# Altium PCB digital.PcbDoc (part 3 of 3)
Units mm, origin at the board's own origin, x right, y up, seen from the top; angles counter-clockwise.
Board outline 25.2 x 25.2 mm, 4 copper layers (Top Layer, Inner Layer 1, Inner Layer 2, Bottom Layer), stack 1.51 mm thick; 75 components, 68 nets, 309 pads, 118 vias.
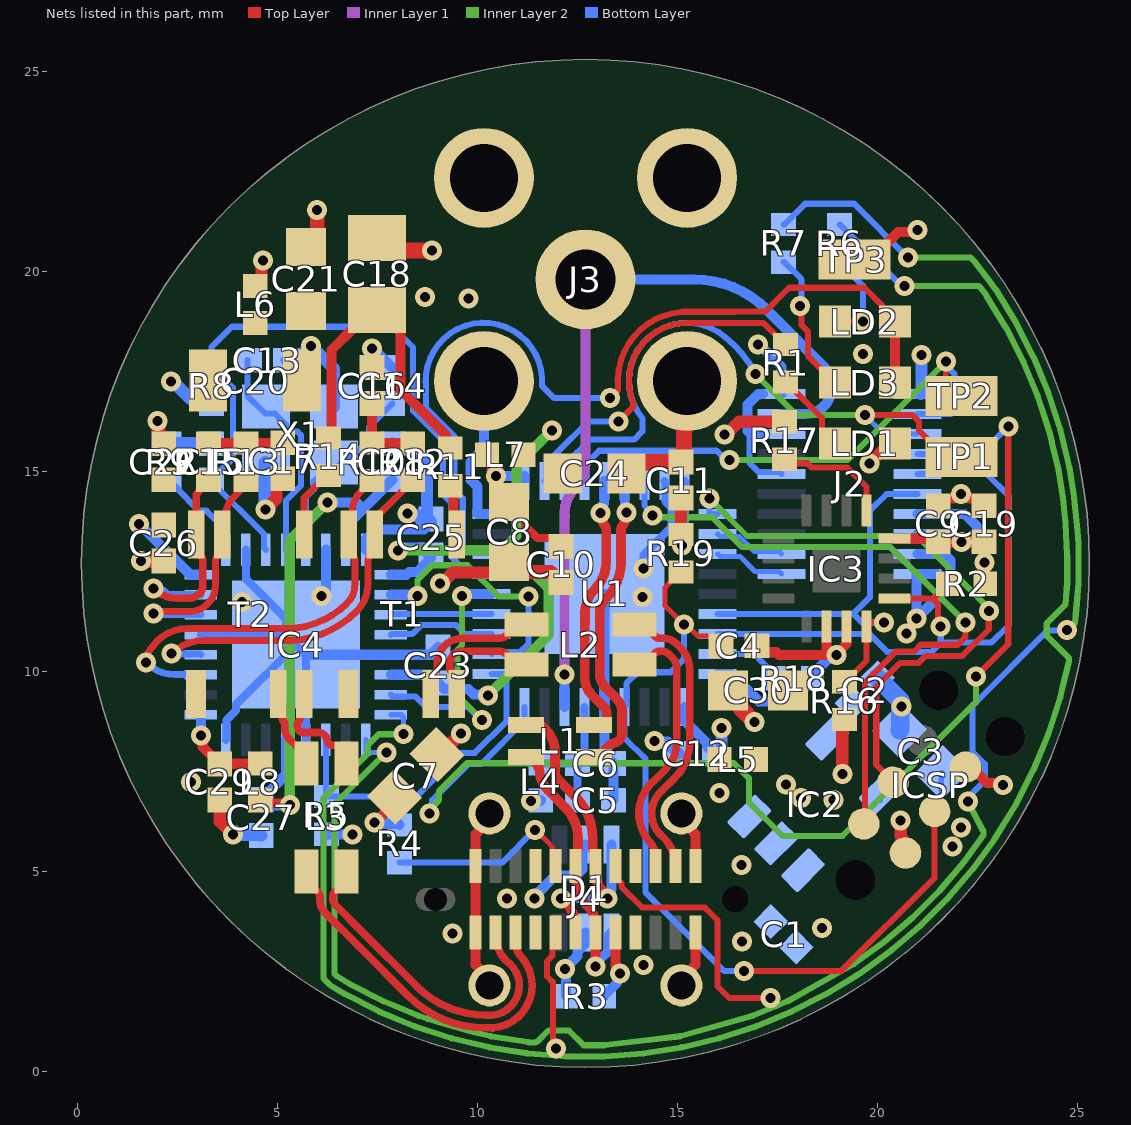
[diagram p4: the nets of this part, all layers, seen from the top]

## Via types
v1: diameter 0.5, hole 0.25, Top Layer to Bottom Layer, tented both sides, 118 vias

## Nets (pads, with @x,y where several pads share a name; then routed paths per layer and width w, separated by ;. In a path a pad name is that pad's centre, name@x,y a point inside that pad or via, vN(x,y) a via of type N, cw(c..) or ccw(c..) an arc to the next point about the centre after c; other vN are vias at no path point) (continued)
ETH_LED0: IC4.1 J4.B8 R7.1 | length 54.4
  Top Layer w0.152: J4.B8@13.45,5.13 13.45,4.855 13.597,4.708 13.597,4.621 14.119,4.098 15.684,4.098 16.002,3.78 16.002,2.134 16.299,1.836 v1(17.323,1.836)
  Inner Layer 2 w0.152: v1(7.722,7.976) 6.426,6.68 6.426,2.441 6.484,2.383 6.81,2.183 7.654,1.754 8.528,1.391 8.754,1.318 8.977,1.245 ; 8.978,1.245 ccw(c9.024,1.39) 8.982,1.244 9.886,0.989 ccw(c9.927,1.136) 9.89,0.988 10.343,0.879 ccw(c10.378,1.027) 10.354,0.877 11.278,0.731 11.396,0.721 ccw(c11.408,0.873) 11.516,0.765 11.774,1.024 12.287,1.024 12.655,0.656 13.167,0.656 ccw(c13.167,0.808) 13.185,0.657 14.279,0.786 ; 14.279,0.786 14.958,0.867 15.05,0.878 ccw(c15.022,1.027) 15.057,0.879 ccw(c15.022,1.027) 15.064,0.881 16.86,1.388 ccw(c16.818,1.534) 16.862,1.388 16.865,1.389 ccw(c16.821,1.535) 16.879,1.394 17.447,1.63 17.5,1.652 ; v1(17.323,1.836) 17.5,1.659 17.5,1.652 ; 19.401,2.681 cw(c19.313,2.805) 19.387,2.672 17.756,1.758 cw(c17.682,1.892) 17.741,1.751 17.5,1.652 ; 19.402,2.681 20.162,3.234 20.882,3.849 21.551,4.518 22.166,5.238 22.654,5.91 22.654,5.997 22.637,6.03 v1(22.262,6.746) ; v1(20.763,20.345) 22.328,20.345 22.417,20.256 22.801,19.763 22.955,19.552 23.419,18.795 23.461,18.726 23.9,17.863 24.269,16.974 24.271,16.969 24.459,16.39 24.57,16.048 24.638,15.766 cw(c24.367,15.699) 24.638,15.764 24.795,15.111 cw(c24.523,15.046) 24.799,15.088 24.912,14.374 cw(c24.637,14.329) 24.915,14.355 24.997,13.525 24.997,13.523 25.024,13.184 25.024,12.222 25.024,12.216 24.971,11.546 24.942,11.213 24.905,11.176 24.901,11.172 24.897,11.168 v1(24.737,11.032)
  Bottom Layer w0.127: IC4.1@7.211,8.293 7.211,8.032 7.267,7.976 v1(7.722,7.976)
  Bottom Layer w0.152: R7.1@17.653,21.171 17.673,21.171 18.194,21.692 19.417,21.692 v1(20.763,20.345) ; v1(22.262,6.746) 22.262,6.84 22.685,7.263 22.685,7.682 22.377,7.99 22.377,9.144 24.259,11.025 24.731,11.025 v1(24.737,11.032)
ETH_LED1: IC4.32 J4.A8 R6.1 | length 49.6
  Top Layer w0.152: J4.A8@11.95,3.47 11.876,3.396 11.876,3.033 11.875,3.032 11.875,2.89 11.739,2.753 11.739,2.378 11.887,2.229 11.887,0.834 11.895,0.825 11.895,0.637 v1(11.962,0.57)
  Inner Layer 1 w0.152: v1@11.962,0.503 v1(11.962,0.57)
  Inner Layer 2 w0.152: v1(8.153,8.433) 8.149,8.429 7.534,8.429 7.268,8.163 7.268,7.953 6.147,6.832 6.147,2.325 6.309,2.162 6.674,1.939 7.537,1.5 8.424,1.132 ccw(c8.483,1.272) 8.434,1.128 8.436,1.127 ; 8.437,1.127 8.441,1.126 9.352,0.83 10.28,0.607 ccw(c10.378,1.027) 10.309,0.601 11.235,0.455 ccw(c11.301,0.881) 11.265,0.451 v1@11.948,0.397 ; v1(11.962,0.57) 11.962,0.411 v1@11.948,0.397 ; 16.96,1.126 16.048,0.83 15.106,0.604 14.301,0.476 14.155,0.453 14.15,0.452 13.184,0.376 12.216,0.376 v1@11.948,0.397 ; 16.961,1.126 ccw(c16.872,1.391) 16.978,1.133 17.858,1.497 17.863,1.5 18.721,1.937 19.468,2.394 19.543,2.44 ; 19.544,2.44 ccw(c19.397,2.678) 19.561,2.451 20.328,3.009 ccw(c20.162,3.234) 20.343,3.021 20.674,3.304 21.064,3.636 ccw(c20.882,3.849) 21.079,3.651 21.757,4.328 22.386,5.065 22.934,5.819 23.463,6.679 23.9,7.537 24.271,8.431 24.568,9.347 24.57,9.352 24.629,9.596 24.788,10.259 24.788,10.34 24.743,10.385 24.232,10.897 24.232,11.201 24.701,11.67 24.744,12.227 24.744,12.899 ccw(c24.592,12.899) 24.744,12.907 24.699,13.701 ccw(c24.546,13.692) 24.698,13.707 24.637,14.329 24.523,15.046 24.366,15.701 24.359,15.733 24.301,15.972 24.199,16.286 24.009,16.872 24.006,16.877 23.647,17.746 23.217,18.59 23.206,18.607 ; v1(20.672,19.635) 22.472,19.635 22.535,19.635 22.58,19.59 22.588,19.581 22.722,19.397 23.197,18.622
  Bottom Layer w0.127: IC4.32@7.836,8.918 8.097,8.918 8.153,8.862 v1(8.153,8.433)
  Bottom Layer w0.152: R6.1@19.05,21.171 19.07,21.171 20.606,19.635 v1(20.672,19.635)
ETH_RST: C15.2 IC4.19 R8.1 U1.15 | length 18.4
  Bottom Layer w0.152: C15.2@3.302,14.79 4.668,13.424 4.668,13.087 IC4.19@4.711,13.043 ; C15.2@3.35,14.79 3.737,15.177 3.744,15.177 3.886,15.319 3.886,17.099 3.37,17.615 R8.1@3.35,17.615 3.35,18.107 3.861,18.618 7.874,18.618 8.389,18.103 8.389,16.515 9.144,15.761 9.144,14.413 9.352,14.205 9.352,12.857 9.721,12.488 9.864,12.488 9.865,12.487 10.303,12.487 U1.15@10.352,12.438
ETH_SPI.CSN: IC4.26 U1.11 | length 6.5
  Inner Layer 2 w0.152: v1(8.5,11.891) 8.5,12.283 8.872,12.655 9.748,12.655 10.53,11.873 v1(11.277,11.873)
  Bottom Layer w0.152: U1.11@10.352,10.438 10.401,10.487 11.071,10.487 11.277,10.692 v1(11.277,11.873)
  Bottom Layer w0.254: IC4.26@7.836,11.918 8.473,11.918 v1(8.5,11.891)
ETH_SPI.INT: IC4.3 R5.1 U1.10 | length 8.2
  Bottom Layer w0.152: IC4.3@6.211,8.293 6.211,6.883 R5.1@6.223,6.871 8.471,6.871 9.563,7.963 9.937,7.963 10.728,8.754 10.728,9.692 10.726,9.694 10.726,9.889 10.677,9.938 U1.10@10.352,9.938
ETH_SPI.MISO: IC4.27 U1.13 | length 2.5
  Bottom Layer w0.152: IC4.27@7.836,11.418 7.854,11.436 8.476,11.436 8.477,11.438 U1.13@10.352,11.438
ETH_SPI.MOSI: IC4.31 U1.14 | length 6.7
  Inner Layer 2 w0.152: v1(9.617,11.891) 9.617,10.655 9.503,10.541 9.503,9.398 v1(10.112,8.789)
  Bottom Layer w0.152: IC4.31@7.836,9.418 7.88,9.375 8.445,9.375 8.705,9.115 9.761,9.115 10.087,8.789 v1(10.112,8.789)
  Bottom Layer w0.254: v1(9.617,11.891) 9.664,11.938 U1.14@10.352,11.938
ETH_SPI.SCLK: IC4.28 U1.12 | length 2.7
  Bottom Layer w0.152: IC4.28@7.836,10.918 7.852,10.934 8.368,10.934 8.593,11.159 9.466,11.159 9.687,10.938 U1.12@10.352,10.938
ETHJ.RX_N: J4.B10 L2.1 | length 7
  Top Layer w0.191: L2.1@13.923,10.168 ccw(c13.923,10.772) 14.35,10.345 14.36,10.355 ccw(c14.318,10.398) 14.378,10.398 14.434,10.453 cw(c14.568,10.319) 14.568,10.509 14.6,10.509 cw(c14.6,10.243) 14.788,10.431 14.867,10.353 cw(c14.579,10.065) 14.986,10.065 14.986,8.233 cw(c14.031,8.233) 14.706,7.558 14.407,7.259 cw(c14.274,7.395) 14.4,7.252 ccw(c15.1,6.45) 14.298,7.15 cw(c14.155,7.276) 14.291,7.142 14.284,7.136 14.284,7.134 ccw(c15.1,6.45) 14.291,5.758 14.293,5.756 ccw(c15.1,6.45) 14.324,5.721 cw(c14.184,5.591) 14.333,5.711 cw(c13.907,5.374) 14.436,5.495 ccw(c14.622,5.539) 14.448,5.46 14.505,5.46 14.45,5.374 J4.B10@14.45,5.13 ccw(c14.318,5.262) J4.B10@14.505,5.262
ETHJ.RX_P: J4.B11 L2.4 | length 7.4
  Top Layer w0.191: L2.4@13.923,11.168 cw(c13.923,10.564) 14.35,10.991 14.36,10.981 cw(c14.318,10.938) 14.378,10.938 14.434,10.883 ccw(c14.568,11.017) 14.568,10.827 14.665,10.827 cw(c14.665,10.401) 14.966,10.702 15.093,10.576 cw(c14.584,10.067) 15.303,10.067 15.303,8.23 cw(c14.038,8.23) 14.933,7.336 14.624,7.027 cw(c14.49,7.162) 14.615,7.018 ccw(c15.1,6.45) 14.528,6.931 ccw(c15.1,6.45) 14.631,5.868 14.654,5.846 cw(c13.938,5.13) J4.B11@14.95,5.13
ETHJ.TX_N: J4.A10 L3.1 | length 9.8
  Top Layer w0.191: L3.1@5.723,5 ccw(c6.327,5) 5.9,4.573 5.91,4.563 ccw(c5.953,4.605) 5.953,4.545 6.008,4.489 cw(c5.874,4.355) 6.064,4.355 6.064,4.264 ccw(c6.475,4.264) 6.184,3.973 7.034,3.124 7.036,3.124 8.274,1.886 ccw(c10.196,3.808) 10.196,1.09 ccw(c10.3,2.152) 11.225,2.685 ccw(c10.3,2.152) 11.107,2.851 cw(c11.485,3.229) 10.95,3.229 J4.A10@10.95,3.47 J4.A10@10.95,3.14
ETHJ.TX_P: J4.A11 L3.4 | length 8.7
  Top Layer w0.191: L3.4@6.723,5 cw(c6.119,5) 6.546,4.573 6.536,4.563 cw(c6.493,4.605) 6.493,4.545 6.437,4.489 ccw(c6.572,4.355) 6.382,4.355 6.382,4.329 ccw(c6.634,4.329) 6.455,4.151 7.096,3.511 7.098,3.511 8.482,2.127 ccw(c10.22,3.864) 10.22,1.407 ; 10.221,1.407 ccw(c10.3,2.15) 10.362,1.405 10.373,1.406 cw(c10.391,1.217) 10.382,1.407 ; 10.382,1.407 ccw(c10.3,2.15) 10.719,2.769 cw(c11.368,3.418) 10.45,3.418 J4.A11@10.45,3.47 cw(c10.318,3.338) J4.A11@10.505,3.338
ETHP_RX_N: IC4.12 R12.2 T1.2 | length 9.4
  Top Layer w0.175: v1(2.355,10.443) cw(c3.146,9.652) 3.146,10.771 5.111,10.771 ccw(c5.119,10.946) 5.114,10.771 ccw(c5.208,13.272) 6.978,11.502 ccw(c6.282,12.199) 7.267,12.199 7.267,12.75 cw(c7.542,12.75) 7.347,12.944 ccw(c7.153,13.139) 7.428,13.139 T1.2@7.428,13.42 7.545,13.537 7.545,13.932 7.865,14.252 8.159,14.547 cw(c8.333,14.52) 8.164,14.567 cw(c8.21,14.547) 8.174,14.582 8.348,14.756 cw(c8.382,14.722) R12.2@8.382,14.77
  Bottom Layer w0.175: v1(2.355,10.443) 2.367,10.431 3.073,10.431 IC4.12@3.086,10.418
ETHP_RX_P: IC4.11 R10.2 T1.1 | length 10.7
  Top Layer w0.175: v1@1.778,10.375 cw(c1.565,10.375) v1(1.716,10.225) cw(c2.292,10.225) 1.877,10.625 cw(c2.752,10) 2.752,11.075 5.224,11.075 ccw(c5.223,13.218) 6.74,11.703 ccw(c6.254,12.187) 6.939,12.187 6.939,12.75 ccw(c6.664,12.75) T1.1@6.859,12.944 ; T1.1@6.859,12.944 cw(c7.053,13.139) 6.778,13.139 T1.1@6.778,13.42 ccw(c6.584,13.614) 6.859,13.614 6.859,13.938 cw(c7.691,13.938) 7.102,14.526 7.332,14.756 cw(c7.366,14.722) R10.2@7.366,14.77
  Bottom Layer w0.175: v1@1.804,10.225 v1(1.716,10.225) ccw(c2.456,10.965) 2.456,9.918 IC4.11@3.086,9.918
ETHP_TX_N: IC4.15 R15.2 T2.1 | length 5.5
  Top Layer w0.191: v1@1.932,12.071 v1(1.905,12.071) ccw(c2.483,12.649) 2.483,11.832 2.791,11.832 ccw(c2.791,12.161) 3.024,11.928 cw(c3.048,11.904) 3.048,11.938 ccw(c2.84,12.146) 3.134,12.146 3.134,12.741 ccw(c2.85,12.741) 3.051,12.942 cw(c3.252,13.143) 2.968,13.143 T2.1@2.968,13.42 2.968,14.352 cw(c3.172,14.352) 3.027,14.495 3.087,14.555 cw(c3.136,14.555) 3.101,14.589 3.268,14.756 cw(c3.302,14.722) R15.2@3.302,14.77
  Bottom Layer w0.191: v1(1.905,12.071) 1.964,12.012 2.158,12.012 2.252,11.918 IC4.15@3.086,11.918
ETHP_TX_P: IC4.14 R13.2 T2.2 | length 6.1
  Top Layer w0.175: v1(1.904,11.442) 1.966,11.504 2.839,11.504 ccw(c2.839,12.046) 3.222,11.663 3.273,11.713 ccw(c2.84,12.146) 3.452,12.146 3.452,12.741 cw(c3.736,12.741) 3.535,12.942 ccw(c3.334,13.143) 3.618,13.143 T2.2@3.618,13.42 ccw(c3.405,13.633) 3.706,13.633 3.706,13.883 cw(c4.371,13.883) 3.901,14.353 4.096,14.548 cw(c4.144,14.548) 4.11,14.582 4.284,14.756 cw(c4.318,14.722) R13.2@4.318,14.77
  Bottom Layer w0.175: v1(1.904,11.442) 1.928,11.418 IC4.14@3.086,11.418
ETHT_RX_N: L2.2 T1.7 | length 3
  Top Layer w0.191: T1.7@9.478,9.44 9.478,9.717 ccw(c9.194,9.717) 9.395,9.918 cw(c9.596,10.119) 9.312,10.119 9.312,10.206 cw(c9.606,10.206) 9.398,10.414 cw(c9.628,10.184) 9.628,10.509 10.524,10.509 cw(c10.524,10.188) 10.751,10.415 cw(c10.708,10.373) 10.768,10.373 10.871,10.27 ccw(c11.118,10.518) 11.118,10.168 L2.2@11.223,10.168
ETHT_RX_P: L2.3 T1.6 | length 3.5
  Top Layer w0.191: T1.6@8.828,9.44 8.828,9.717 cw(c9.112,9.717) 8.911,9.918 ccw(c8.71,10.119) 8.994,10.119 8.994,10.208 cw(c9.602,10.208) 9.172,10.637 9.175,10.64 cw(c9.626,10.189) 9.626,10.827 10.524,10.827 ccw(c10.524,11.148) 10.751,10.921 ccw(c10.708,10.963) 10.768,10.963 10.871,11.066 cw(c11.118,10.818) 11.118,11.168 L2.3@11.223,11.168
ETHT_TX_N: L3.2 T2.6 | length 2
  Top Layer w0.191: T2.6@5.018,9.44 cw(c4.753,9.175) 5.128,9.175 5.128,8.811 ccw(c5.224,8.811) 5.156,8.743 cw(c5.088,8.675) 5.184,8.675 5.184,8.57 ccw(c5.534,8.57) 5.287,8.323 5.469,8.141 ccw(c5.5,8.172) 5.5,8.128 cw(c5.5,8.084) 5.531,8.115 5.621,8.025 cw(c5.373,7.778) 5.723,7.778 L3.2@5.723,7.7
ETHT_TX_P: L3.3 T2.7 | length 2.6
  Top Layer w0.191: T2.7@5.668,9.44 ccw(c5.933,9.175) 5.558,9.175 5.558,8.811 cw(c5.462,8.811) 5.53,8.743 ccw(c5.598,8.675) 5.502,8.675 5.502,8.636 ccw(c5.692,8.636) 5.558,8.501 ccw(c5.658,8.663) 5.657,8.472 6.023,8.472 cw(c6.023,8.25) 6.242,8.289 ccw(c6.429,8.325) 6.343,8.155 6.373,8.155 cw(c6.373,7.805) 6.621,8.052 cw(c6.373,7.805) 6.723,7.805 L3.3@6.723,7.7
GND: C1.1 C2.1 C3.1 C4.1 C5.1 C6.1 C7.1 C8.1 C9.1 C10.1 C11.1 C12.1 C13.2 C14.1 C15.1 C16.1 C17.1 C18.1 C19.1 C20.1 C21.1 C22.1 C23.1 C24.1 C25.1 C26.1 C27.1 C28.1 C29.1 C30.1 D1.2 IC2.2 IC3.10 IC3.11 IC4.4 IC4.8 IC4.13 IC4.18 IC4.22 IC4.24 IC4.29 IC4.33 ICSP.5 J2.12 J2.16 J2.19 J2.20 J3.SH1 J3.SH2 J3.SH3 J3.SH4 J4.A1 J4.A12 J4.B1 J4.B12 J4.Shell R3.1 R4.2 R9.1 R18.2 TP3.1 U1.5 U1.18 U1.26 U1.36 U1.37 X1.2 X1.4 | length 83.9
  Top Layer w0.254: C21.1@5.715,20.612 C21.1@5.994,20.891 ; v1(7.432,6.223) 7.928,6.718 C7.1@7.928,6.861 ; C18.1@7.493,20.839 C18.1@7.809,20.523 ; J4.Shell@10.3,2.15 10.3,2.316 9.95,2.666 J4.A12@9.95,3.47 J4.B1@9.95,5.13 9.95,5.934 10.3,6.284 J4.Shell@10.3,6.45 ; C24.1@13.729,14.954 C24.1@14.007,15.233 ; J4.Shell@15.1,2.15 15.1,2.316 15.45,2.666 J4.A1@15.45,3.195 ; J4.Shell@15.1,6.45 15.1,6.284 15.45,5.934 J4.B12@15.45,5.13 ; J4.A1@15.45,3.47 J4.A1@15.45,3.195 ; J4.A1@15.473,3.172 J4.A1@15.45,3.195 ; C4.1@16.985,10.643 17.15,10.478 17.472,10.478 17.536,10.414 v1@18.726,10.414 ; IC3.10@18.726,11.119 v1@18.726,10.414 ; IC3.11@19.226,11.119 19.226,10.686 18.974,10.434 v1(18.974,10.414) v1@18.726,10.414 ; TP3.1@19.431,20.295 19.831,20.295 20.521,20.984 20.959,20.984 v1(21.006,21.031) ; C9.1@21.52,14.144 21.703,14.327 21.91,14.327 21.976,14.393 22.046,14.393 v1(22.093,14.44) 22.14,14.393 22.207,14.393 22.273,14.327 22.48,14.327 C19.1@22.663,14.144 ; ICSP.5@22.204,7.607 22.349,7.607 22.746,7.21 23.092,7.21 v1(23.139,7.163)
  Top Layer w0.305: C29.1@3.556,6.789 3.556,6.248 v1(3.886,5.918) ; v1(4.699,14.046) 4.699,14.048 4.973,14.322 4.973,14.658 C17.1@5.131,14.815 ; v1(9.06,12.201) 9.112,12.201 9.382,12.471 10.529,12.471 C8.1@10.795,12.737
  Top Layer w0.356: v1(1.589,12.758) C26.1@2.159,12.758 ; v1(2.001,16.26) 2.029,16.232 2.029,15.82 C22.1@2.159,15.69 ; C21.1@5.994,20.891 v1(5.994,21.539) ; C8.1@10.795,12.737 11.046,12.487 11.828,12.487 C10.1@12.09,12.225
  Top Layer w0.406: C18.1@7.809,20.523 v1(8.865,20.523) ; C24.1@14.007,15.233 C11.1@15.088,15.233 15.164,15.309 15.164,17.184 J3.SH2@15.24,17.26 ; C30.1@16.268,9.525 16.565,9.228 16.565,9.098 v1(16.931,8.732)
  Bottom Layer w0.127: v1(2.001,16.26) v1@2.04,16.221 ; R9.1@2.04,15.937 2.266,15.71 R9.1@2.286,15.71 ; C15.1@3.33,15.71 C15.1@3.35,15.69
  Bottom Layer w0.152: 16.801,15.959 16.801,15.221 17.037,14.985 17.555,14.985 J2.12@17.604,14.936
  Bottom Layer w0.203: IC4.13@3.086,10.918 IC4.33@5.211,10.918 ; IC4.8@3.711,8.293 3.729,8.311 3.729,8.788 3.963,9.021 3.963,9.17 IC4.33@5.461,10.668 ; IC4.18@4.211,13.043 4.211,12.315 5.211,11.315 IC4.33@5.211,10.918 ; IC4.4@5.711,8.293 5.711,10.418 IC4.33@5.461,10.668 ; v1(14.148,12.573) 14.148,12.909 14.855,13.616 14.855,14.092 14.7,14.247 14.7,14.74 U1.26@14.677,14.763 ; IC4.33@5.211,10.918 IC4.33@5.461,10.668
  Bottom Layer w0.254: C13.2@5.2,17.78 5.383,17.963 5.603,17.963 5.775,18.136 v1(5.842,18.136) ; IC4.33@5.711,10.418 IC4.29@7.836,10.418 8.825,10.418 C23.1@9.017,10.61 ; v1(6.096,11.887) 6.211,12.002 IC4.22@6.211,13.043 ; IC4.24@7.211,13.043 7.211,13.313 7.218,13.32 7.24,13.32 7.472,13.551 8.656,13.551 C25.1@8.839,13.734 ; v1(7.365,18.075) 7.394,18.075 C14.1@7.874,17.595 ; v1(7.432,6.223) 7.464,6.191 8.02,6.191 R4.2@8.052,6.16 ; J3.SH3@9.83,16.93 J3.SH3@10.16,17.26 10.16,15.57 9.83,15.24 9.83,14.791 10.004,14.617 10.004,13.94 10.006,13.938 U1.18@10.352,13.938 ; R3.1@12.23,1.88 12.211,1.899 12.211,2.546 v1(12.192,2.565) 12.192,2.58 12.504,2.892 12.504,3.001 12.7,3.197 D1.2@12.7,3.472 ; U1.37@13.177,11.938 U1.5@13.177,9.113 13.177,7.923 C6.1@13.404,7.696 C5.1@13.404,6.782 ; U1.36@16.002,9.938 16.348,9.938 17.034,9.252 17.822,9.252 18.214,9.645 18.214,9.743 18.377,9.906 18.377,9.926 18.818,10.367 18.927,10.367 v1(18.974,10.414) ; 16.801,15.959 16.75,16.01 16.75,16.666 17.014,16.93 17.05,16.93 17.054,16.934 J2.20@17.131,16.934 ; 16.899,15.938 J2.16@17.131,15.938 ; v1(17.013,18.173) 17.044,18.173 17.604,17.613 J2.20@17.604,16.936 ; J2.19@21.004,16.936 21.08,16.936 J2.19@21.082,16.938
  Bottom Layer w0.305: R9.1@2.04,15.937 v1@2.04,16.221 ; R9.1@2.286,15.71 C15.1@3.33,15.71 ; v1(3.886,5.918) 3.895,5.909 4.588,5.909 C27.1@4.597,5.9 ; X1.2@4.699,15.205 X1.2@4.712,15.218 ; v1(5.842,18.136) 6.412,17.566 X1.4@6.412,16.618 ; C28.1@7.874,15.69 8.032,15.532 8.452,15.532 8.738,15.247 8.738,14.479 8.74,14.477 8.74,13.873 C25.1@8.72,13.853 ; v1(8.255,13.945) 8.308,13.945 v1@8.361,13.892 ; v1@8.463,13.892 8.682,13.892 C25.1@8.72,13.853 ; C25.1@8.608,13.741 C25.1@8.72,13.853 ; C25.1@8.839,13.734 C25.1@8.72,13.853 ; v1(14.427,8.255) 14.465,8.218 14.751,8.218 C12.1@15.019,7.95 ; J2.19@21.082,16.938 21.103,16.959 v1(21.103,17.91)
  Bottom Layer w0.356: v1(4.699,14.046) X1.2@4.699,15.205
  Bottom Layer w0.457: C2.1@20.003,9.843 20.591,9.255 20.591,9.127 v1(20.599,9.119) 20.599,9.107 20.569,9.077 20.569,8.549 C3.1@20.552,8.531
  other v1: 16.612,3.251 9.373,3.454 18.618,3.581 16.598,5.157 4.115,11.735 14.122,11.862 9.779,19.329 8.687,19.355
I2C1.SCL: IC3.12 J2.9 R16.1 U1.33 | length 10.5
  Top Layer w0.152: R16.1@19.177,9.741 19.197,9.741 19.726,10.27 19.726,11.178 19.774,11.226 v1(20.158,11.226)
  Bottom Layer w0.152: U1.33@16.002,11.438 19.398,11.438 ; v1(20.158,11.226) 19.61,11.226 19.398,11.438 ; J2.9@21.004,14.436 20.227,14.436 19.812,14.021 19.812,11.853 19.398,11.438
I2C1.SDA: IC3.13 J2.11 R2.1 U1.34 | length 16.2
  Top Layer w0.152: IC3.13@20.426,11.819 21.402,11.819 21.755,12.172 R2.1@21.755,12.192 ; 21.377,11.819 21.515,11.681 21.515,11.188 v1(21.582,11.121)
  Bottom Layer w0.152: U1.34@16.002,10.938 19.794,10.938 20.242,10.49 21.353,10.49 21.582,10.719 ; J2.11@21.004,14.936 22.732,14.936 23.269,14.399 23.269,14.068 23.277,14.061 23.277,11.147 22.848,10.719 21.582,10.719 ; v1(21.582,11.121) 21.582,10.719
LED_ENABLE: LD2.2 LD3.2 U1.16 | length 22.5
  Top Layer w0.152: v1(13.314,16.84) v1@13.456,16.983 ; 13.501,17.027 13.503,17.033 13.515,17.062 13.515,17.092 13.515,17.099 cw(c15.24,17.26) 15.093,18.986 ccw(c15.079,19.138) 15.124,18.993 16.456,18.993 16.457,18.994 17.192,18.994 17.789,19.591 19.677,19.591 20.111,19.157 20.111,19.069 LD2.2@20.435,18.745
  Top Layer w0.178: v1@13.456,16.983 13.501,17.027
  Top Layer w0.254: LD3.2@20.435,17.018 LD3.2@20.435,17.221 LD2.2@20.435,18.542
  Bottom Layer w0.152: U1.16@10.352,12.938 10.303,12.987 9.721,12.987 9.632,13.076 9.632,14.32 9.423,14.529 9.423,15.876 8.712,16.588 8.712,17.135 cw(c10.16,17.26) 8.712,17.385 8.712,17.425 cw(c10.16,17.26) 8.713,17.434 cw(c10.16,17.26) 11.612,17.139 11.657,17.094 11.911,16.84 v1(13.314,16.84)
NetC2_2: C2.2 IC2.4
NetC13_1: C13.1 IC4.20 X1.3 | length 5.7
  Bottom Layer w0.152: C13.1@4.249,17.78 4.249,16.896 4.697,16.448 4.932,16.448 5.236,16.144 5.236,16.089 5.325,16 5.499,16 5.588,15.91 5.588,14.645 5.211,14.268 IC4.20@5.211,13.043
NetC14_2: C14.2 IC4.21 X1.1 | length 4.7
  Bottom Layer w0.152: IC4.21@5.711,13.043 5.711,14.355 5.909,14.553 5.909,14.744 6.212,15.048 6.438,15.048 6.886,15.496 6.999,15.496 7.29,15.787 7.29,16.111 C14.2@7.874,16.695
NetC16_2: C16.2 R10.1 R12.1 | length 2
  Top Layer w0.254: C16.2@7.366,16.695 R10.1@7.366,15.71 R12.1@8.382,15.71
NetC17_2: C17.2 R13.1 R15.1 | length 2
  Top Layer w0.254: R15.1@3.302,15.71 4.318,15.71 5.314,15.71 C17.2@5.334,15.69
NetC18_2: C18.2 R11.2 R14.2 | length 8
  Top Layer w0.254: R14.2@6.35,15.964 6.35,18.034 6.895,18.579 6.895,18.591 7.343,19.039 C18.2@7.493,19.039 7.629,19.039 8.077,18.591 8.077,17.043 9.215,15.906 9.215,15.746 9.378,15.583 R11.2@9.398,15.583
NetIC3_1: IC3.1 R17.1 | length 3
  Top Layer w0.152: R17.1@17.615,15.418 17.829,15.204 18.248,15.204 18.358,15.094 19.247,15.094 19.726,14.615 IC3.1@19.726,14.019
NetIC4_17: IC4.17 R9.2 | length 2.4
  Bottom Layer w0.152: R9.2@2.286,14.77 2.306,14.77 2.494,14.582 2.494,14.562 3.035,14.021 3.226,14.021 3.693,13.554 3.693,13.061 IC4.17@3.711,13.043
NetJ4_A5: J4.A5 R3.2 | length 1.8
  Top Layer w0.241: J4.A5@13.45,3.47 13.453,3.467 13.453,2.628 13.559,2.523 v1(13.559,2.453)
  Bottom Layer w0.241: R3.2@13.17,1.88 13.17,1.9 13.509,2.239 13.509,2.403 v1(13.559,2.453)
NetJ4_B5: J4.B5 R4.1 | length 4.9
  Top Layer w0.127: v1(11.438,6.038) 11.454,6.038 11.864,5.628 11.864,5.216 J4.B5@11.95,5.13
  Bottom Layer w0.152: R4.1@8.052,5.22 10.62,5.22 v1(11.438,6.038)
NetLD1_1: LD1.1 R1.2 | length 2.1
  Top Layer w0.152: R1.2@17.704,17.234 17.724,17.234 18.611,16.346 18.611,16.021 LD1.1@18.935,15.697
NetLD2_1: LD2.1 R6.2 | length 2.4
  Top Layer w0.152: LD2.1@18.935,18.745 v1(19.634,18.745)
  Bottom Layer w0.152: R6.2@19.05,20.231 19.07,20.231 19.284,20.017 19.284,19.997 19.634,19.647 v1(19.634,18.745)
NetLD3_1: LD3.1 R7.2 | length 3.6
  Top Layer w0.152: v1(18.059,19.138) 18.106,19.092 18.106,18.66 18.263,18.503 18.263,17.894 LD3.1@18.935,17.221
  Bottom Layer w0.152: R7.2@17.653,20.231 17.673,20.231 18.102,19.802 18.102,19.181 v1(18.059,19.138)
NetR1_1: R1.1 U1.20 | length 8.8
  Top Layer w0.152: v1(13.524,16.249) 13.894,16.62 13.894,16.683 13.894,16.712 cw(c15.24,17.26) 15.24,18.713 16.572,18.713 16.573,18.715 17.143,18.715 17.684,18.174 R1.1@17.704,18.174
  Bottom Layer w0.152: U1.20@11.677,14.763 11.726,14.812 11.726,15.207 12.013,15.494 12.767,16.248 v1(13.524,16.249) v1(13.524,16.249)
NetR11_1: R11.1 T1.3 T1.4 | length 1.3
  Top Layer w0.254: R11.1@9.398,14.643 9.398,13.895 9.478,13.815 T1.4@9.478,13.42
NetR14_1: R14.1 T2.3 T2.4 | length 2
  Top Layer w0.152: R14.1@6.116,14.786 6.116,14.81 6.33,15.024 R14.1@6.35,15.024
  Top Layer w0.178: T2.4@5.668,13.42 5.668,14.338 R14.1@6.116,14.786
  Top Layer w0.254: T2.4@5.668,13.42 T2.4@5.746,13.498
NetR18_1: R18.1 U1.35 | length 1.7
  Bottom Layer w0.152: U1.35@16.002,10.438 16.905,10.438 17.229,10.114 17.249,10.114 17.437,9.926 R18.1@17.437,9.906
NRST: C4.2 ICSP.3 R19.1 U1.4 | length 21.6
  Top Layer w0.127: R19.1@14.839,12.357 R19.1@14.941,12.357 ; R19.1@15.088,12.484 15.076,12.484 14.949,12.357 R19.1@14.941,12.357 ; C4.2@16.085,10.643 15.839,10.889 15.501,10.889 15.211,11.179 v1(15.168,11.179) 15.149,11.179 14.692,11.636 14.692,12.1 14.841,12.249 14.841,12.258 R19.1@14.941,12.357
  Top Layer w0.152: v1(16.662,2.515) 19.101,2.515 21.429,4.843 ICSP.3@21.429,6.501
  Bottom Layer w0.152: v1(15.168,11.179) 15.168,10.317 14.83,9.979 14.002,9.979 13.726,9.703 13.726,9.162 U1.4@13.677,9.113 13.682,9.108 13.682,8.327 13.726,8.283 14.151,7.867 cw(c14.044,7.758) 14.152,7.865 14.197,7.821 14.197,4.478 16.16,2.515 v1(16.662,2.515)
P3V3: C3.2 C7.2 C8.2 C9.2 C10.2 C11.2 C12.2 C19.2 IC2.5 IC3.16 ICSP.1 J2.5 J2.7 L4.1 L6.1 L7.1 LD1.2 R2.2 R5.2 R8.2 R16.2 R17.2 R19.2 U1.1 U1.19 U1.27 | length 25.5
  Top Layer w0.127: C8.2@10.795,14.237 10.82,14.237 C8.2@11.193,13.864
  Top Layer w0.203: C8.2@11.193,13.864 11.193,13.637 11.498,13.333 11.882,13.333 C10.2@12.09,13.125
  Top Layer w0.254: IC3.16@20.426,13.319 20.428,13.317 21.447,13.317 C9.2@21.52,13.244
  Top Layer w0.305: L6.1@4.445,19.637 4.452,19.637 4.599,19.785 4.599,20.239 v1(4.637,20.276) ; C7.2@8.989,7.922 9.06,7.922 v1(9.586,8.448) ; L7.1@10.233,15.418 10.381,15.27 10.381,15.021 10.465,14.937 10.465,14.56 10.787,14.237 C8.2@10.795,14.237 ; v1(15.118,13.154) 15.103,13.169 15.103,13.409 R19.2@15.088,13.424 ; R19.2@15.12,13.456 R19.2@15.088,13.424 ; C11.2@15.12,14.301 C11.2@15.088,14.333 R19.2@15.088,13.424 ; v1(16.173,15.927) 16.226,15.927 16.542,16.243 R17.2@17.678,16.243 ; v1(19.126,7.442) 19.122,7.447 19.122,8.746 R16.2@19.177,8.801 ; v1(19.797,15.193) 20.183,15.579 LD1.2@20.183,15.585 ; v1(20.581,6.275) 20.581,5.882 20.608,5.855 20.608,5.554 ICSP.1@20.701,5.461 ; C9.2@21.52,13.244 21.526,13.239 22.093,13.239 v1(22.098,13.233) 22.104,13.239 22.658,13.239 C19.2@22.663,13.244 22.673,13.235 22.673,12.735 v1(22.682,12.725) 22.689,12.719 22.689,12.198 R2.2@22.695,12.192
  Bottom Layer w0.127: C12.2@15.919,7.95 C12.2@16.104,8.135 ; IC2.5@20.059,6.778 IC2.5@20.079,6.778 ; C3.2@21.595,6.871 21.595,7.453 C3.2@21.612,7.471
  Bottom Layer w0.203: v1(15.118,13.154) 15.118,13.234 15.185,13.302 15.185,14.755 U1.27@15.177,14.763 U1.27@15.164,14.75
  Bottom Layer w0.254: R5.2@6.223,5.931 6.225,5.929 6.877,5.929 v1(6.879,5.927) ; v1(10.465,14.884) 11.175,14.884 11.177,14.882 U1.19@11.177,14.763 ; L4.1@11.272,6.779 L4.1@11.582,6.779 L4.1@11.565,6.762 ; v1(11.334,6.762) L4.1@11.565,6.762 ; L4.1@11.553,6.749 L4.1@11.565,6.762 ; U1.1@15.177,9.113 15.177,8.767 15.399,8.545 15.403,8.545 15.736,8.212 15.736,8.133 C12.2@15.919,7.95 ; J2.5@21.004,13.436 21.006,13.434 21.831,13.434 22.031,13.233 v1(22.098,13.233) ; J2.7@21.004,13.936 22.183,13.936 22.682,13.437 v1(22.682,12.725)
  Bottom Layer w0.305: v1(2.337,17.247) 2.39,17.247 2.824,16.813 3.212,16.813 R8.2@3.35,16.675 ; C12.2@16.104,8.135 v1(16.104,8.585)
  other v1: 21.883,5.619 22.089,6.1 18.898,6.782 2.845,7.239 19.634,17.932
P5V0: C1.2 C30.2 IC2.1 IC2.3 J2.1 J2.3 L5.2 | length 4.3
  Bottom Layer w0.254: J2.3@21.004,12.936 21.475,12.936 21.477,12.934 21.67,12.934 21.819,12.785 21.819,12.167 v1(20.98,11.328) 20.98,12.434 20.982,12.436 21.475,12.436 J2.1@21.477,12.438
  other v1: 18.093,6.835 17.71,7.172 20.726,10.947
PA3V3: C5.2 C6.2 L4.2 U1.6 | length 3.3
  Bottom Layer w0.203: L4.2@11.582,7.699 12.501,7.699 C6.2@12.504,7.696 ; C5.2@12.504,6.782 C6.2@12.504,7.696 ; U1.6@12.677,9.113 12.677,7.869 C6.2@12.504,7.696
PD_BIAS: J2.13 U1.9 | length 30.5
  Top Layer w0.152: v1(22.466,9.879) 23.269,10.683 23.269,16.111 v1(23.278,16.12)
  Inner Layer 2 w0.152: v1(8.799,6.445) 8.799,6.539 9.042,6.783 9.042,7.012 9.735,7.705 16.414,7.705 16.785,7.333 16.785,6.735 17.635,5.886 19.119,5.886 22.463,9.23 22.463,9.877 v1(22.466,9.879)
  Bottom Layer w0.152: v1(8.799,6.445) 8.866,6.512 8.866,6.783 9.766,7.684 10.098,7.684 11.177,8.763 U1.9@11.177,9.113 ; J2.13@21.004,15.436 22.576,15.436 23.26,16.12 v1(23.278,16.12)
PP1V8: C27.2 C28.2 IC4.5 IC4.23 L8.1 | length 14.5
  Top Layer w0.254: L8.1@4.572,6.779 4.649,6.702 5.262,6.702 v1(5.309,6.655)
  Inner Layer 2 w0.254: v1(5.309,6.655) 5.309,13.284 v1(6.248,14.224)
  Bottom Layer w0.254: IC4.5@5.211,8.293 5.211,7.414 C27.2@4.597,6.8 4.743,6.655 v1(5.309,6.655) ; v1(6.248,14.224) 6.985,14.224 7.146,14.063 ; IC4.23@6.711,13.043 6.718,13.051 6.718,13.634 7.146,14.063 ; C28.2@7.874,14.79 7.146,14.063
PP3V3: C23.2 C24.2 C25.2 IC4.25 IC4.30 L7.2 | length 15.7
  Inner Layer 2 w0.254: v1(8.01,13.03) 10.617,13.03 10.677,13.09 ; v1(10.262,9.398) 11.781,10.917 11.781,12.082 10.773,13.09 10.677,13.09 ; v1(11.862,16.027) 10.973,15.138 10.973,13.386 10.677,13.09
  Bottom Layer w0.254: IC4.30@7.836,9.918 8.809,9.918 C23.2@9.017,9.71 9.168,9.559 9.774,9.559 9.906,9.427 10.233,9.427 v1(10.262,9.398) ; IC4.25@7.836,12.418 8.226,12.418 8.291,12.483 8.488,12.483 8.839,12.834 8.579,13.094 8.141,13.094 8.077,13.03 v1(8.01,13.03)
PPA1V8: C29.2 IC4.9 L8.2 | length 2.4
  Top Layer w0.254: v1(3.086,8.394) 3.133,8.347 3.133,8.112 C29.2@3.556,7.689 3.561,7.694 4.567,7.694 L8.2@4.572,7.699
  Bottom Layer w0.254: v1(3.086,8.394) IC4.9@3.086,8.918
PPA3V3: C20.2 C21.2 C22.2 C26.2 IC4.16 L6.2 T1.5 T2.5 | length 2.1
  Bottom Layer w0.254: v1(1.535,13.686) 1.548,13.686 2.816,12.418 IC4.16@3.086,12.418
PVBUS: D1.5 J4.A4 J4.A9 J4.B4 J4.B9 L5.1 | length 2.2
  Bottom Layer w0.254: v1(11.43,4.318) 11.43,4.381 11.952,4.902 12.478,4.902 12.627,5.051 12.627,5.599 D1.5@12.7,5.672
  other v1: 14.148,2.667 10.744,4.318 16.053,6.96
SEN_SIGNAL: J2.18 J3.H U1.7 | length 19.8
  Top Layer w0.127: v1(12.177,9.921) cw(c12.228,9.921) v1@12.192,9.957
  Inner Layer 1 w0.254: v1(12.177,9.921) 12.177,13.797 cw(c12.431,13.796) 12.179,13.824 ccw(c11.678,13.883) 12.178,13.949 cw(c12.43,13.98) 12.177,13.956 cw(c13.095,13.956) 12.446,14.605 ccw(c11.833,15.218) 12.7,15.218 J3.H@12.7,19.8
  Bottom Layer w0.254: U1.7@12.177,9.113 v1(12.177,9.921) ; J3.H@12.7,19.8 15.424,19.8 cw(c15.424,17.26) 17.22,19.056 18.669,17.608 cw(c18.184,17.122) 18.184,16.436 J2.18@17.604,16.436
SWCLK: ICSP.4 U1.28 | length 15.2
  Top Layer w0.152: ICSP.4@20.389,7.23 20.389,7.249 19.97,7.668 19.97,9.611 20.574,10.215 21.03,10.215 21.204,10.389 22.123,10.389 22.784,11.049 v1(22.784,11.505)
  Inner Layer 2 w0.152: v1(15.799,14.326) 16.739,13.386 20.98,13.386 22.784,11.582 v1(22.784,11.505)
  Bottom Layer w0.152: v1(15.799,14.326) 15.799,13.987 15.848,13.938 U1.28@16.002,13.938
SWDIO: ICSP.2 U1.25 | length 16.8
  Top Layer w0.152: ICSP.2@19.661,6.189 19.69,6.219 19.69,9.727 20.458,10.494 20.914,10.494 21.088,10.668 22.008,10.668 22.2,10.86 v1(22.2,11.227)
  Inner Layer 2 w0.152: v1(14.376,13.894) 14.414,13.856 15.874,13.856 16.623,13.106 20.32,13.106 v1(22.2,11.227)
  Bottom Layer w0.152: U1.25@14.177,14.763 14.177,14.144 14.376,13.944 v1(14.376,13.894)
TIA_GAIN_SEL_A: J2.2 U1.30 | length 1.8
  Bottom Layer w0.127: U1.30@16.002,12.938 16.064,12.876 16.562,12.876 16.942,12.497 17.543,12.497 J2.2@17.604,12.436
TIA_GAIN_SEL_B: J2.4 U1.29 | length 1.8
  Bottom Layer w0.127: U1.29@16.002,13.438 16.064,13.376 16.545,13.376 16.924,12.998 17.542,12.998 J2.4@17.604,12.936
USART1.RX: J2.17 TP2.1 U1.22 | length 14
  Top Layer w0.127: v1(21.709,17.746) 21.709,17.28 TP2.1@22.098,16.891
  Inner Layer 2 w0.152: v1(16.306,15.284) 19.247,15.284 v1(21.709,17.746)
  Bottom Layer w0.152: U1.22@12.677,14.763 12.726,14.812 12.726,15.199 13.043,15.517 15.98,15.517 16.212,15.284 v1(16.306,15.284) ; J2.17@21.004,16.436 21.833,16.436 21.922,16.525 21.922,17.439 21.709,17.652 v1(21.709,17.746)
USART1.TX: J2.15 TP1.1 U1.21 | length 16.2
  Top Layer w0.152: v1(19.685,16.408) 20.879,16.408 21.038,16.249 21.038,16.027 21.698,15.367 TP1.1@22.098,15.367
  Inner Layer 2 w0.152: v1(16.951,17.434) 17.977,16.408 v1(19.685,16.408)
  Bottom Layer w0.127: v1(19.685,16.408) 20.157,15.936 J2.15@21.004,15.936
  Bottom Layer w0.152: U1.21@12.177,14.763 12.226,14.812 12.226,15.199 12.823,15.796 13.917,15.796 14.126,16.005 14.126,16.21 14.126,16.274 14.126,16.327 cw(c15.24,17.26) 16.187,18.363 cw(c15.24,17.26) 16.189,18.361 cw(c14.348,16.052) 16.932,17.481 v1(16.951,17.434)
USBJ_D_N: D1.6 J4.A7 J4.B7 L1.4 | length 8.8
  Top Layer w0.241: L1.4@11.215,8.655 11.325,8.701 11.369,8.719 11.417,8.719 11.443,8.719 cw(c11.382,8.357) 11.643,8.615 11.7,8.558 cw(c11.129,7.985) 11.938,7.985 11.938,7.493 ccw(c12.214,7.493) 12.018,7.298 12.455,6.862 cw(c11.42,5.826) 12.884,5.826 12.884,5.555 cw(c12.679,5.428) 12.921,5.428 12.921,5.201 ccw(c13.021,5.201) J4.B7@12.95,5.13 ; v1(12.09,4.328) 12.228,4.19 cw(c11.738,3.697) 12.431,3.744 ccw(c12.672,3.762) 12.434,3.721 12.446,3.648 cw(c12.209,3.607) 12.45,3.607 J4.A7@12.45,3.47 ; J4.B7@12.95,5.13 J4.B7@12.979,4.826 ; J4.B7@12.979,4.825 ccw(c13.387,4.841) 13.166,4.496 cw(c13.035,4.294) 13.254,4.395 v1(13.254,4.324)
  Bottom Layer w0.241: v1(12.09,4.328) 13.251,4.328 v1(13.254,4.324) ccw(c13.023,4.555) 13.35,4.555 D1.6@13.35,5.672
USBJ_D_P: D1.1 J4.A6 J4.B6 L1.1 | length 7.2
  Top Layer w0.241: L1.1@11.215,7.855 11.465,7.776 11.465,7.705 cw(c11.169,7.456) 11.555,7.48 ccw(c12.252,7.532) 11.653,7.172 ccw(c12.252,7.532) 11.759,7.037 12.192,6.604 cw(c11.41,5.822) 12.495,6.038 cw(c11.41,5.822) 12.516,5.822 12.516,5.555 ccw(c12.721,5.428) 12.479,5.429 12.479,5.201 cw(c12.379,5.201) J4.B6@12.45,5.13 ; J4.B6@12.479,4.889 12.45,4.922 J4.B6@12.45,5.13 ; v1(12.955,2.624) 12.953,2.627 12.953,3.467 J4.A6@12.95,3.47 12.95,3.695 ccw(c12.357,3.695) 12.95,3.699 ccw(c12.357,3.695) 12.776,4.115 12.735,4.156 cw(c13.125,4.547) 12.573,4.547 12.573,4.551 ccw(c12.4,4.551) 12.522,4.674 cw(c12.697,4.848) 12.45,4.848 J4.B6@12.45,5.13
  Bottom Layer w0.241: v1(12.955,2.624) 12.955,2.694 13.271,3.009 13.271,3.393 D1.1@13.35,3.472
USBM_D_N: L1.3 U1.23 | length 6.8
  Top Layer w0.241: L1.3@12.915,8.655 13.098,8.655 ccw(c13.098,8.79) 13.194,8.695 ccw(c13.098,8.79) 13.233,8.79 13.233,8.949 ccw(c13.012,8.949) 13.168,9.106 12.845,9.43 cw(c13.225,9.81) 12.687,9.81 12.687,11.192 12.687,11.455 cw(c13.546,11.455) 12.939,12.062 ccw(c12.254,12.747) 13.222,12.747 13.222,13.545 ccw(c13.06,13.545) 13.175,13.66 cw(c13.29,13.775) 13.127,13.775 13.127,13.847 ccw(c12.958,13.847) v1(13.078,13.966)
  Bottom Layer w0.241: v1(13.078,13.966) 13.127,14.015 13.127,14.153 13.173,14.198 13.173,14.759 U1.23@13.177,14.763
USBM_D_P: L1.2 U1.24 | length 7.9
  Top Layer w0.241: L1.2@12.915,7.855 ccw(c12.915,8.087) 13.079,7.923 13.244,7.934 13.14,7.934 cw(c13.375,7.877) 13.203,8.047 13.307,8.15 cw(c13.476,7.979) 13.421,8.214 ccw(c13.365,8.455) 13.612,8.438 cw(c13.853,8.42) 13.614,8.458 13.614,9.001 ccw(c13.18,9.001) 13.487,9.308 13.213,9.582 cw(c13.594,9.963) 13.055,9.963 13.055,11.031 13.056,11.455 cw(c13.546,11.455) 13.199,11.802 ccw(c12.254,12.747) 13.591,12.747 13.591,13.548 cw(c13.748,13.548) 13.637,13.66 ccw(c13.525,13.771) 13.683,13.771 13.683,13.849 cw(c13.852,13.849) v1(13.732,13.968)
  Bottom Layer w0.241: U1.24@13.677,14.763 13.681,14.759 13.681,14.125 ccw(c13.768,14.125) 13.707,14.064 cw(c13.645,14.002) 13.732,14.002 v1(13.732,13.968)
pads on no net: D1.3 D1.4 IC3.2 IC3.4 IC3.6 IC3.7 IC3.14 IC3.15 IC3.17 IC4.2 IC4.6 IC4.7 IC4.10 ICSP.0 ICSP.6 J4.A2 J4.A3 J4.B2 J4.B3 J4.MH1 J4.MH2 U1.2 U1.3

## Polygon pours and split planes (outlines as drawn)
PVBUS on Top Layer "PA3V3_L01_P-001" (solid, pour order 0): 10.236,5.639 10.236,2.972 13.716,2.972 13.716,2.489 14.402,2.493 14.402,4.165 16.453,4.166 16.45,4.3 16.453,8.331 15.224,8.331 15.189,5.639 13.64,5.639
PPA3V3 on Top Layer "PA3V3_L01_P-001" (solid, pour order 7): 0,19.025 0,8.738 7.036,8.738 7.036,10.541 2.464,10.575 2.464,15.912 5.207,18.542 6.198,18.542 6.198,19.025
PP3V3 on Top Layer "PA3V3_L01_P-001" (solid, pour order 8): 11.125,16.281 11.125,14.986 11.379,14.732 12.598,14.732 12.598,16.281
P5V0 on Top Layer "PA3V3_L01_P-001" (solid, pour order 2): 17.272,10.033 17.272,8.712 16.662,8.103 16.662,6.375 18.263,6.375 18.263,8.814 18.263,10.033
P3V3 on Bottom Layer "PA3V3_L01_P-001" (solid, pour order 11): 21.768,14.072 22.479,14.072 23.012,13.538 23.012,12.344 22.123,12.344 22.123,12.852 21.768,13.208
GND on Bottom Layer "GND_L04_P014" (solid, pour order 14): 16.924,7.145 14.529,4.75 17.462,1.816 19.164,3.518 18.293,4.39 18.293,5.776
GND on Bottom Layer "GND_L04_P013" (solid, pour order 13): 18.688,10.484 20.115,9.058 20.115,8.767 18.886,7.538 19.765,6.659 21.583,8.477 20.879,9.182 20.879,9.677 19.38,11.176
P3V3 on Bottom Layer "PA3V3_L01_P-001" (solid, pour order 10): 18.237,6.909 19.787,5.359 22.301,5.359 22.344,5.402 22.344,7.717 21.583,8.477 20.777,7.671 18.999,7.671
P5V0 on Bottom Layer "PA3V3_L01_P-001" (solid, pour order 3): 17.548,7.763 18.44,6.871 18.44,6.477 19.469,5.448 17.323,3.302 16.891,3.734 17.323,4.166 17.323,4.801 18.295,5.773 17.546,6.522 16.637,5.613 16.022,6.237
NetC2_2 on Bottom Layer "PA3V3_L01_P-001" (solid, pour order 6): 19.355,9.652 17.92,8.217 18.58,7.556 20.015,8.992
P5V0 on Bottom Layer "PA3V3_L01_P-001" (solid, pour order 4): 20.396,12.139 21.615,12.139 21.615,11.684 20.98,11.049 20.98,10.947 20.472,10.947 20.472,11.43 20.396,11.506
P3V3 on Inner Layer 2 "P3V3_L03_P009" (solid, pour order 9): 0,0 0,25.3 25.3,25.3 25.3,0
P5V0 on Inner Layer 2 "PA3V3_L01_P-001" (solid, pour order 5): 20.993,11.697 21.463,11.227 18.344,8.108 18.344,6.583 17.954,6.583 17.466,7.071 17.466,8.169
PVBUS on Inner Layer 2 "PA3V3_L01_P-001" (solid, pour order 1): 10.49,4.572 11.074,5.156 15.316,5.156 15.9,5.74 15.9,7.214 16.307,7.214 16.307,5.461 15.392,4.547 14.402,4.547 14.402,2.667 13.894,2.667 13.894,4.699 11.913,4.699 11.684,4.47 11.684,4.318 10.49,4.318
GND on Inner Layer 1 "GND_L02_P012" (solid, pour order 12): 0,0 0,25.3 25.3,25.3 25.3,0

## Other copper
Top Layer:
  rectangle net P3V3: 22.405,11.882 22.973,12.934
  rectangle net P3V3: 21.21,12.934 22.973,13.554
  region net P3V3: 9.933,15.728 10.533,15.728 10.533,15.108 11.295,14.346 11.295,13.762 10.295,13.762 9.933,14.124
Bottom Layer:
  rectangle net GND: 8.068,13.438 9.149,14.044

## Silkscreen, mask and mechanical layers (free items; w line width, h text height)
Mechanical 1:
  circle w0.1: c12.7,12.7 r12.6
Top Courtyard:
  circle w1: c12.7,12.7 r12.7
Mechanical 15:
  circle w0.05: c12.7,12.7 r11.4